# Altium PCB 矩形板V3.0.pcbdoc (part 2 of 2)
Units mm, origin at the board's own origin, x right, y up, seen from the top; angles counter-clockwise.
Board outline 153.8 x 190.94 mm, 2 copper layers (Top Layer, Bottom Layer); 146 components, 210 nets, 672 pads, 247 vias.
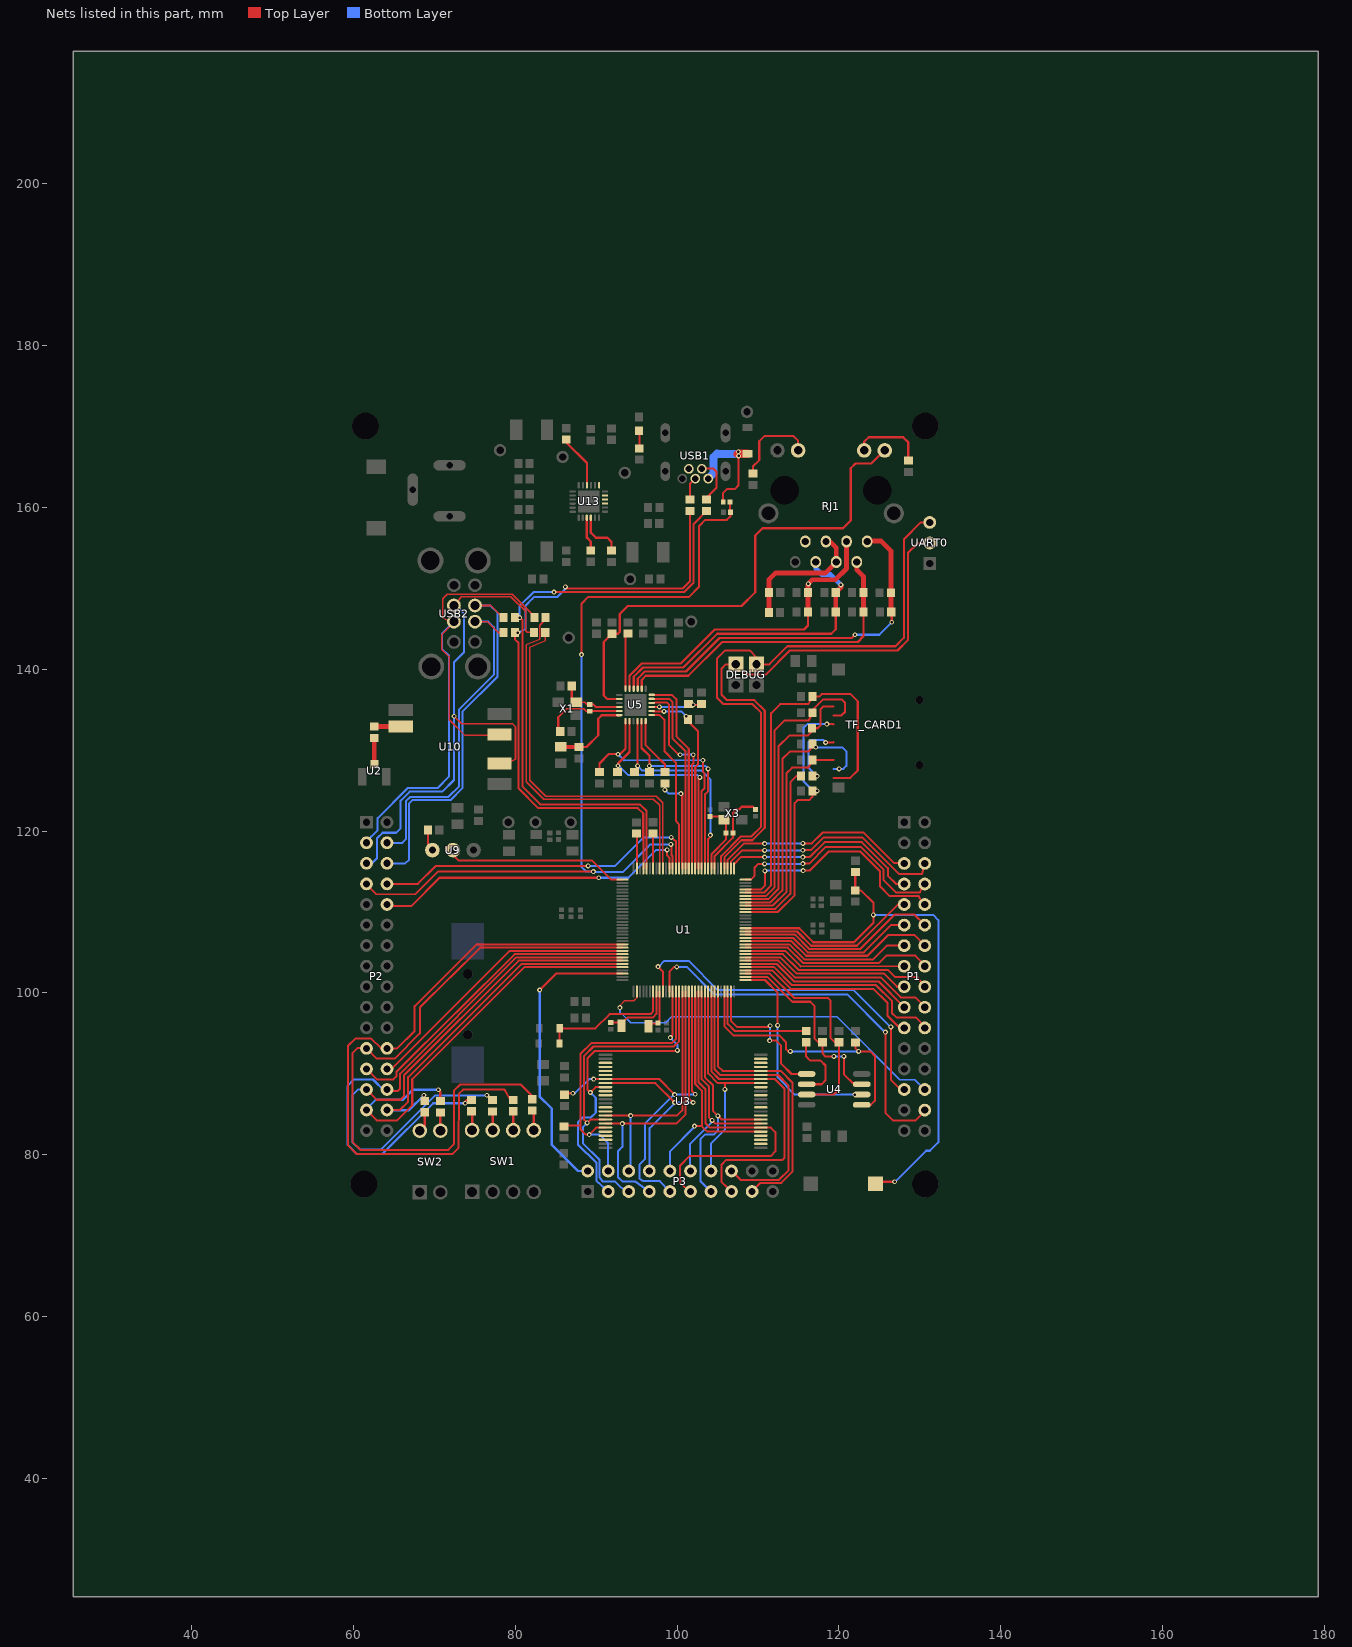
[diagram p2: the nets of this part, all layers, seen from the top]

## Via types
v1: diameter 0.61, hole 0.305, Top Layer to Bottom Layer, 247 vias

## Nets (pads, with @x,y where several pads share a name; then routed paths per layer and width w, separated by ;. In a path a pad name is that pad's centre, name@x,y a point inside that pad or via, vN(x,y) a via of type N, cw(c..) or ccw(c..) an arc to the next point about the centre after c; other vN are vias at no path point) (continued)
PB6: P3.2 U1.30 | length 36.6
  Top Layer w0.254: v1(83.011,100.359) 85.042,102.39 U1.30@93.241,102.389
  Bottom Layer w0.3: v1(83.011,100.359) 83.011,87.221 84.522,85.71 84.526,81.205 87.766,77.999 P3.2@88.951,77.999
PB7: P1.28 U1.34 | length 46.4
  Top Layer w0.2: v1(92.941,98.189) 92.942,98.448 93.511,99.019 94.631,99.019 95.042,99.431 U1.34@95.042,100.188
  Bottom Layer w0.2: v1(92.941,98.189) 92.942,97.648 94.26,96.33 98.601,96.33 99.32,97.048 119.751,97.048 127.519,89.279 129.37,89.279 130.6,88.059 P1.28@130.711,88.059
PB8: P1.27 U1.42 | length 44.5
  Top Layer w0.25: v1(97.641,103.249) 98.24,102.65 U1.42@98.24,100.189 ; v1(126.411,95.809) 126.411,89.279 127.631,88.059 P1.27@128.171,88.059
  Bottom Layer w0.25: v1@97.641,103.241 97.722,103.241 98.42,103.952 101.42,103.952 104.981,100.388 121.771,100.388 126.348,95.811 v1(126.411,95.809)
PB13: P1.10 U1.93 | length 29.3
  Top Layer w0.254: U1.93@108.44,112.79 110.382,112.79 110.841,113.249 v1(110.841,115.089) ; v1(115.561,115.109) 116.36,115.108 118.723,117.47 122.652,117.47 125.065,115.042 125.07,113.162 126.228,111.999 129.833,111.999 130.414,110.919 P1.10@130.711,110.919
  Bottom Layer w0.254: v1(110.841,115.089) 110.861,115.109 v1(115.561,115.109)
PC0: P1.30 U1.44 | length 48.6
  Top Layer w0.25: U1.44@99.04,100.188 99.04,102.629 99.602,103.188 v1@99.96,103.208 ; v1(125.731,95.159) 125.731,85.179 126.701,84.209 129.414,84.209 P1.30@130.711,85.519
  Bottom Layer w0.25: v1@99.96,103.208 101.181,103.208 104.621,99.789 121.061,99.789 125.691,95.159 v1(125.731,95.159)
  other v1: 99.961,103.209
PC1: P3.3 U1.45 U3.9 | length 41.5
  Top Layer w0.25: U3.9@91.151,88.359 89.932,88.359 v1(89.287,87.696) 88.941,88.001 88.935,91.909 89.852,92.838 99.98,92.838 v1(100.041,92.899) ; v1(99.161,94.479) 99.443,94.762 U1.45@99.443,100.196
  Bottom Layer w0.25: v1(89.287,87.696) 89.95,87.028 89.95,85.217 89.342,84.61 88.311,84.61 87.74,84.038 87.732,81.275 90.021,79.042 90.021,76.784 P3.3@91.491,75.459 ; v1(99.161,94.479) 100.041,93.599 v1(100.041,92.899)
PC2: P3.4 R29.2 U1.46 U3.19 | length 39.8
  Top Layer w0.25: R29.2@85.896,83.589 88.032,83.589 ; U3.19@91.151,83.359 90.009,83.359 v1(89.149,82.499) 88.73,82.499 88.07,83.16 88.07,92.469 89.442,93.838 99.391,93.838 99.843,94.29 U1.46@99.843,100.195
  Bottom Layer w0.25: v1(89.149,82.499) 90.43,82.499 91.491,81.44 P3.4@91.491,77.999
PC3: P3.5 U1.47 U3.17 | length 41.6
  Top Layer w0.25: v1(88.896,83.934) 88.527,84.303 88.514,92.222 89.67,93.378 99.602,93.378 100.244,94.018 U1.47@100.244,100.195 ; v1(88.896,83.934) 89.321,84.359 U3.17@91.151,84.359
  Bottom Layer w0.25: v1(88.896,83.934) 88.36,83.416 88.36,81.43 90.412,79.378 90.412,77.214 90.795,76.726 92.291,76.728 92.373,76.657 93.061,75.969 93.914,75.458 P3.5@94.031,75.459
PC4: P3.6 U1.48 U3.16 | length 31.4
  Top Layer w0.25: U3.16@91.151,84.859 94.221,84.859 v1(94.251,84.829) ; v1@94.25,84.828 99.98,84.828 100.643,85.491 U1.48@100.643,100.195
  Bottom Layer w0.25: P3.6@94.031,77.999 94.251,78.219 v1(94.251,84.829)
PC5: P3.7 U1.49 U3.18 | length 36.9
  Top Layer w0.25: U3.18@91.151,83.859 93.221,83.859 v1(93.241,83.839) ; v1(93.241,83.839) 99.894,83.838 101.06,85.034 U1.49@101.044,100.193
  Bottom Layer w0.25: v1(93.241,83.839) 93.241,80.98 92.7,80.439 92.7,77.239 93.244,76.706 94.809,76.711 P3.7@96.571,75.459
PC6: P3.8 U1.50 U3.8 | length 35.5
  Top Layer w0.25: U3.8@91.151,88.859 97.3,88.859 v1(99.7,86.46) ; U1.50@101.442,100.196 101.442,87.003 v1(101.986,86.46)
  Bottom Layer w0.25: P3.8@96.571,77.999 96.611,78.039 96.611,83.299 99.7,86.388 v1(99.7,86.46) v1(101.986,86.46)
PC7: P3.9 R28.1 U1.51 U3.7 | length 47.3
  Top Layer w0.25: R28.1@86.111,87.414 86.3,87.603 v1(87.127,87.603) ; U3.7@91.151,89.359 97.772,89.359 v1(99.7,87.432) ; U1.51@101.844,100.196 101.844,87.872 v1(102.24,87.476)
  Top Layer w0.3: v1(89.691,89.349) 89.701,89.359 U3.7@91.151,89.359
  Bottom Layer w0.25: v1(87.127,87.603) 87.381,87.603 89.127,89.349 v1(89.691,89.349) ; P3.9@99.111,75.459 97.857,76.749 95.792,76.749 95.332,77.069 95.332,78.788 96.04,79.5 96.04,83.878 99.594,87.432 v1(99.7,87.432) 102.196,87.432 v1(102.24,87.476)
PC8: P3.10 U1.52 U3.29 | length 32.3
  Top Layer w0.25: v1(102.151,83.549) 103.051,83.549 ; U1.52@102.243,100.195 102.243,88.743 103.051,87.935 103.051,83.548 ; U3.29@110.351,82.859 103.749,82.86 103.051,83.548
  Bottom Layer w0.25: P3.10@99.111,77.999 99.111,80.399 102.151,83.438 v1(102.151,83.549)
PC9: P3.11 U1.53 U3.30 | length 44.5
  Top Layer w0.25: P3.11@101.651,75.459 100.361,76.49 100.361,78.649 101.588,79.878 111.608,79.878 112.152,80.419 112.152,82.799 111.59,83.358 U3.30@110.351,83.359 104.059,83.358 103.511,83.881 103.511,88.11 102.644,88.966 U1.53@102.644,100.195
PC10: P3.12 U1.54 U3.31 | length 30.1
  Top Layer w0.25: U1.54@103.043,100.195 103.043,89.339 103.97,88.41 103.97,84.599 v1(104.331,84.239) 104.711,83.859 U3.31@110.351,83.859
  Bottom Layer w0.25: P3.12@101.651,77.999 101.611,78.039 101.611,81.338 104.331,84.059 v1(104.331,84.239)
PC11: P3.13 U1.55 U3.32 | length 32.9
  Top Layer w0.25: U1.55@103.445,100.195 103.439,89.576 104.461,88.557 104.461,85.389 v1(105.041,84.809) ; v1@105.04,84.808 105.548,84.359 U3.32@110.351,84.359
  Bottom Layer w0.25: P3.13@104.191,75.459 102.921,76.698 102.921,81.979 103.47,82.53 104.57,82.53 105.041,83.001 v1(105.041,84.809)
PC12: P3.14 U1.56 U3.41 | length 28.7
  Top Layer w0.25: U1.56@103.843,100.196 103.843,90.064 105.047,88.859 U3.41@110.351,88.859 ; v1(105.901,88.079) 105.912,88.09 105.912,88.859
  Bottom Layer w0.25: P3.14@104.191,77.999 104.212,81.42 105.901,83.109 v1(105.901,88.079)
PC13: P3.15 U1.57 U3.42 | length 40.3
  Top Layer w0.25: U1.57@104.244,100.196 104.244,90.297 105.182,89.359 U3.42@110.351,89.359 ; P3.15@106.731,75.459 105.492,76.609 105.492,78.788 106.028,79.329 112.97,79.329 113.269,79.639 113.272,88.156 112.07,89.36 U3.42@110.351,89.359
PC14: P3.16 U1.58 U3.43 | length 38.1
  Top Layer w0.25: U1.58@104.643,100.196 104.643,90.534 105.318,89.859 U3.43@110.351,89.859 ; P3.16@106.731,77.999 107.831,76.909 112.591,76.909 113.79,78.108 113.79,88.539 112.472,89.858 U3.43@110.351,89.859
PC15: P3.17 U1.59 U3.44 | length 36.3
  Top Layer w0.25: U1.59@105.045,100.195 105.045,90.937 105.623,90.359 U3.44@110.351,90.359 ; P3.17@109.231,75.458 110.308,76.538 112.871,76.538 114.25,77.917 114.25,88.931 112.82,90.358 U3.44@110.351,90.359
PD8: P1.21 U1.68 | length 23.5
  Top Layer w0.254: U1.68@108.44,102.788 111.743,102.789 114.021,100.508 124.25,100.508 125.972,98.814 125.969,97.211 127.511,95.669 P1.21@128.047,95.669
PD9: P1.22 U1.69 | length 26.3
  Top Layer w0.254: U1.69@108.44,103.189 111.982,103.19 114.201,100.968 124.572,100.968 126.531,99.009 126.531,97.518 127.082,96.97 129.49,96.97 P1.22@130.711,95.679
PD10: P1.19 U1.70 | length 21.9
  Top Layer w0.254: U1.70@108.44,103.588 112.281,103.589 114.44,101.43 124.88,101.43 P1.19@128.061,98.219
PD11: P1.20 U1.71 | length 24.6
  Top Layer w0.254: U1.71@108.44,103.989 112.52,103.99 114.621,101.89 125.2,101.89 127.62,99.461 129.401,99.459 P1.20@130.711,98.219
PD12: P1.17 U1.72 | length 21.2
  Top Layer w0.254: U1.72@108.44,104.388 112.799,104.369 114.781,102.39 125.588,102.39 127.204,100.759 P1.17@128.171,100.759
PD13: P1.18 U1.73 | length 23.9
  Top Layer w0.254: U1.73@108.44,104.789 113.061,104.79 115.002,102.85 126.051,102.85 126.912,101.989 129.632,101.989 P1.18@130.6,100.759
PD14: P1.15 U1.74 | length 20.4
  Top Layer w0.254: U1.74@108.44,105.188 113.361,105.189 115.261,103.289 P1.15@128.061,103.299
PD15: P1.16 U1.75 | length 24
  Top Layer w0.254: U1.75@108.44,105.589 113.681,105.588 115.56,103.708 124.971,103.708 125.863,104.6 129.424,104.6 P1.16@130.711,103.299
PE10: P2.8 U1.115 | length 41.6
  Top Layer w0.254: P2.8@64.161,113.469 67.981,113.469 70.191,115.679 v1@89.002,115.679 ; v1(99.281,119.209) v1(99.281,119.209) 99.841,118.749 U1.115@99.84,115.388
  Bottom Layer w0.254: v1(89.001,115.689) 92.347,115.689 95.827,119.19 v1@99.282,119.19
PE11: P2.7 R68.1 R69.2 U1.116 | length 107.1
  Top Layer w0.24: P2.7@61.621,113.469 61.771,113.259 62.84,112.189 67.651,112.189 70.44,114.978 v1@89.66,114.978
  Top Layer w0.25: v1(88.191,141.789) 88.192,148.1 89.03,148.938 101.491,148.938 102.711,150.16 102.711,157.678 103.49,158.458 106.137,158.458 106.599,158.915 R69.2@106.584,159.398 ; R68.1@106.545,160.649 106.545,159.439 R69.2@106.585,159.399
  Top Layer w0.254: v1(99.241,118.349) 99.302,118.349 99.302,117.038 99.442,116.886 U1.116@99.441,115.388
  Bottom Layer w0.24: v1(89.661,114.989) 89.721,114.929 93.281,114.929 96.441,118.089 96.681,118.349 v1(99.241,118.349)
  Bottom Layer w0.25: v1(88.191,141.789) 88.182,141.78 88.182,115.578 88.758,115.001 v1@89.66,115.001
PE12: P2.10 U1.117 | length 40.2
  Top Layer w0.254: P2.10@63.831,110.719 67.14,110.719 70.651,114.229 v1(90.321,114.229) ; v1(98.761,117.669) 98.761,116.99 99.04,116.711 U1.117@99.04,115.388
  Bottom Layer w0.254: v1(90.321,114.229) 93.965,114.229 97.425,117.668 v1(98.761,117.669)
PF7: P1.8 U1.96 | length 28.2
  Top Layer w0.254: U1.96@108.44,113.989 109.101,113.99 109.581,114.468 109.581,115.489 110.041,115.949 v1(110.821,115.949) ; v1@115.54,115.969 116.32,115.969 118.39,118.039 122.71,118.039 125.522,115.227 125.52,113.929 127.072,112.38 129.98,112.38 130.473,113.459 P1.8@130.6,113.459
  Bottom Layer w0.254: v1(110.821,115.949) 115.521,115.949 v1@115.541,115.969
  other v1: 115.541,115.969
PF8: P1.7 U1.97 | length 25.4
  Top Layer w0.254: U1.97@107.041,115.388 107.041,115.928 107.879,116.769 v1(110.821,116.769) ; v1@115.54,116.789 116.381,116.789 118.23,118.638 122.83,118.638 126.051,115.407 126.051,114.488 127.087,113.452 P1.7@128.07,113.459
  Bottom Layer w0.254: v1(110.821,116.769) 110.841,116.789 v1@115.541,116.789
  other v1: 115.541,116.789
PF9: P1.6 U1.98 | length 28.9
  Top Layer w0.254: U1.98@106.64,115.388 106.64,116.208 108.042,117.61 v1(110.821,117.609) ; v1@115.54,117.63 116.52,117.63 118.111,119.22 122.876,119.22 127.392,114.709 130.264,114.709 P1.6@130.653,116.037
  Bottom Layer w0.254: v1(110.821,117.609) 115.521,117.609 v1@115.541,117.629
  other v1: 115.541,117.629
PF10: P1.5 U1.99 | length 25.8
  Top Layer w0.254: U1.99@106.241,115.388 106.241,116.429 108.26,118.448 v1(110.821,118.449) ; v1@115.54,118.468 116.64,118.468 117.971,119.799 123.041,119.799 126.81,116.03 P1.5@128.06,116.03
  Bottom Layer w0.254: v1(110.821,118.449) 115.521,118.449 v1@115.541,118.469
  other v1: 115.541,118.469
PG0: P2.29 R18.1 U1.28 | length 53.7
  Top Layer w0.254: P2.29@61.621,85.529 62.891,84.259 65.411,84.259 67.28,86.129 67.28,89.35 81.136,103.19 U1.28@93.241,103.189
  Top Layer w0.3: v1(70.501,88.039) 70.751,87.789 R18.1@70.751,86.649
  Bottom Layer w0.3: P2.29@61.291,85.319 62.772,86.799 66.132,86.799 67.384,88.052 v1(70.501,88.039)
PG1: P2.30 R19.1 U1.27 | length 44.4
  Top Layer w0.254: P2.30@64.161,85.529 65.731,85.529 66.762,86.558 66.762,89.591 80.813,103.589 U1.27@93.241,103.588
  Top Layer w0.3: v1(68.711,87.359) 68.711,86.769 R19.1@68.821,86.659
  Bottom Layer w0.3: P2.30@64.161,85.529 66.881,85.529 v1(68.711,87.359)
PG3: P2.27 R61.1 U1.26 | length 69.4
  Top Layer w0.254: P2.27@61.621,88.069 62.891,86.799 65.83,86.799 66.262,87.226 66.259,89.817 80.414,103.99 U1.26@93.241,103.989 ; v1(76.501,87.359) 77.101,86.759 R61.1@77.201,86.759
  Bottom Layer w0.25: P2.27@61.621,88.08 60.6,88.08 59.871,87.348 59.871,81.572 60.839,80.63 63.391,80.63 70.099,87.338 v1@76.5,87.338
PG5: P2.28 R60.1 U1.25 | length 68.8
  Top Layer w0.254: P2.28@63.831,87.859 65.461,87.859 65.792,88.189 65.792,90.028 80.125,104.389 U1.25@93.241,104.388 ; v1(73.811,86.369) 73.811,86.589 74.001,86.779 R60.1@74.591,86.779
  Bottom Layer w0.25: P2.28@63.831,87.859 63.871,87.859 62.431,89.299 60.069,89.299 59.302,88.527 59.302,81.222 60.435,80.099 63.592,80.099 69.861,86.368 v1@73.81,86.368
PG6: P2.25 U1.24 | length 38.9
  Top Layer w0.254: P2.25@61.621,90.609 62.911,89.319 64.953,89.319 65.332,89.703 65.332,90.272 79.919,104.79 U1.24@93.241,104.789
PG7: P2.26 U1.23 | length 35.1
  Top Layer w0.254: P2.26@64.161,90.609 64.74,90.609 79.322,105.189 U1.23@93.241,105.188
PG8: P2.23 R62.1 U1.22 | length 83.5
  Top Layer w0.254: P2.23@61.621,93.149 62.881,91.89 65.101,91.89 68.22,95.006 68.22,98.191 75.657,105.59 U1.22@93.241,105.589 ; P2.23@61.621,93.17 60.491,93.17 59.871,92.547 59.871,81.598 60.882,80.612 71.74,80.62 72.421,81.308 72.426,87.894 73.241,88.71 80.651,88.71 82.101,87.259 R62.1@82.101,86.859
PG9: P2.24 R63.1 U1.21 | length 83.2
  Top Layer w0.25: P2.24@64.161,93.139 63.429,93.139 62.21,94.359 60.254,94.359 59.33,93.439 59.33,81.199 60.453,80.079 72.231,80.079 73.018,80.891 73.028,87.526 73.561,88.059 78.672,88.059 79.391,86.779 R63.1@79.761,86.779
  Top Layer w0.254: P2.24@64.161,93.149 65.418,93.149 67.575,95.293 67.567,98.359 75.23,105.989 U1.21@93.5,105.989
PG11: P1.13 U1.76 | length 21.1
  Top Layer w0.254: U1.76@108.44,105.988 113.881,105.989 115.72,104.148 124.225,104.148 125.946,105.869 P1.13@128.061,105.869
PG12: P1.14 U1.77 | length 24.5
  Top Layer w0.254: U1.77@108.44,106.389 114.141,106.39 115.941,104.59 123.521,104.59 126.061,107.13 129.34,107.13 P1.14@130.6,105.87
PG13: P1.11 U1.78 | length 21.8
  Top Layer w0.254: U1.78@108.44,106.788 114.382,106.769 116.139,105.009 123.071,105.009 126.47,108.41 P1.11@128.06,108.41
PG14: P1.12 U1.79 | length 25.2
  Top Layer w0.254: U1.79@108.44,107.189 114.58,107.188 116.34,105.428 122.611,105.428 126.894,109.69 129.32,109.69 P1.12@130.6,108.41
PG15: P1.9 U1.80 | length 22.5
  Top Layer w0.254: U1.80@108.44,107.588 114.821,107.589 116.559,105.829 122.21,105.829 127.331,110.95 P1.9@128.06,110.95
R3_1: R3.1 U2.3 | length 3.3
  Top Layer w0.6: R3.1@62.581,131.509 62.581,128.249 U2.3@62.591,128.239
R3_2: R3.2 U10.6 | length 3.3
  Top Layer w0.6: R3.2@62.581,132.909 65.853,132.909 U10.6@65.869,132.925
R9_2: LED4.1 R9.2 | length 2.3
  Top Layer w0.28: LED4.1@95.321,169.458 95.342,169.437 R9.2@95.342,167.168
R11_2: R11.2 U13.10 | length 6
  Top Layer w0.3: U13.10@89.345,158.719 89.345,156.853 89.947,156.251 91.367,156.251 91.897,155.723 R11.2@91.897,154.651
R60_2: R60.2 SW1.8 | length 2.4
  Top Layer w0.3: R60.2@74.591,85.379 74.671,85.299 SW1.8@74.671,83.029
R61_2: R61.2 SW1.7 | length 2.3
  Top Layer w0.3: R61.2@77.201,85.359 77.201,83.039 SW1.7@77.211,83.029
R62_2: R62.2 SW1.5 | length 2.5
  Top Layer w0.3: R62.2@82.101,85.459 82.291,85.269 SW1.5@82.291,83.029
R63_2: R63.2 SW1.6 | length 2.4
  Top Layer w0.3: SW1.6@79.751,83.029 79.751,85.369 R63.2@79.761,85.379
R73_2: R73.2 U13.9 | length 4.3
  Top Layer w0.3: U13.9@88.847,158.719 88.847,156.251 89.337,155.761 R73.2@89.337,154.671
R74_1: R74.1 U13.22 | length 6.7
  Top Layer w0.28: R74.1@86.307,168.361 86.307,168.011 88.862,165.456 U13.22@88.862,162.719
RESET: C50.2 R64.1 SW3.2 U1.81 | length 70.8
  Top Layer w0.254: U1.81@108.44,107.989 115.09,107.991 116.82,106.258 121.862,106.258 124.261,108.657 v1(124.261,109.649) 124.261,111.119 122.703,112.677 R64.1@122.017,112.678 ; SW3.2@124.511,76.399 124.781,76.669 v1(126.871,76.669)
  Top Layer w0.3: R64.1@122.017,112.678 122.017,114.878 C50.2@122.067,114.928
  Bottom Layer w0.25: v1(124.261,109.649) 126.501,109.649 131.641,109.649 132.291,108.999 132.291,81.539 132.261,81.539 131.221,80.499 130.771,80.499 126.941,76.669 v1(126.871,76.669)
RJ1_4: C42.1 R17.1 RJ1.4 RJ1.5 | length 16.6
  Top Layer w0.6: C42.1@111.341,149.456 111.341,151.067 112.136,151.859 118.296,151.859 RJ1.4@119.666,153.234 ; R17.1@111.343,147.043 C42.1@111.343,149.456 ; RJ1.5@118.395,155.814 118.867,155.809 119.662,155.019 RJ1.4@119.665,153.274
RJ1_7: RJ1.7
RJ1_10: R46.2 RJ1.10 | length 9.2
  Top Layer w0.3: RJ1.10@123.116,167.064 123.112,168.09 123.681,168.659 127.92,168.659 128.57,168.008 R46.2@128.571,165.759
RJ1_11: R47.2 RJ1.11 | length 10.8
  Top Layer w0.254: R47.2@109.371,164.159 109.37,165.039 110.15,165.819 110.15,168.168 110.811,168.829 114.321,168.829 114.948,168.199 RJ1.11@114.946,167.024
RMIIOREFCLK: C23.2 U1.109 U5.14 | length 23.4
  Top Layer w0.254: U5.14@97.006,134.808 97.025,134.789 v1(98.381,134.789) ; C23.2@101.115,133.566 101.344,133.566 102.581,132.329 102.581,128.229 102.241,127.889 U1.109@102.24,115.388
  Bottom Layer w0.254: v1(98.381,134.789) 100.501,134.789 v1(101.121,134.169)
RMIOCRSDV: R36.2 U1.106 U5.11 | length 26.7
  Top Layer w0.254: U1.106@103.442,115.388 103.441,124.509 103.841,124.909 v1(103.841,127.689)
  Top Layer w0.28: U5.11@95.616,133.678 95.616,130.254 96.581,129.289 v1(96.581,128.049) R36.2@96.581,127.289
  Bottom Layer w0.254: v1(96.581,128.049) 103.48,128.049 v1(103.841,127.689)
RMIOMDC: U1.114 U5.13 | length 21
  Top Layer w0.254: U5.13@96.767,134.328 97.841,134.328 98.42,133.749 98.42,129.888 99.858,128.45 99.858,121.275 100.221,120.828 U1.114@100.241,115.388
RMIOMDIO: R43.1 U1.113 | length 12.3
  Top Layer w0.254: v1(98.501,125.089) R43.1@98.501,125.889 ; v1@100.461,124.629 100.64,124.449 U1.113@100.64,115.388
  Bottom Layer w0.254: v1(98.501,125.089) 98.501,125.069 98.921,124.649 100.441,124.649 v1@100.461,124.629
  other v1: 100.461,124.629
RMIORXD0: R34.2 U1.108 U5.8 | length 29
  Top Layer w0.254: U1.108@102.642,115.388 102.642,126.413 v1@102.82,126.629
  Top Layer w0.28: R34.2@92.66,127.29 92.7,127.328 v1(92.7,128.069) 92.7,128.356 94.113,129.766 U5.8@94.118,133.678
  Bottom Layer w0.254: v1(92.7,128.069) 92.802,128.069 93.96,126.909 102.54,126.909 v1@102.82,126.629
  other v1: 102.821,126.629
RMIORXD1: R35.2 U1.107 U5.7 | length 32.9
  Top Layer w0.254: U1.107@103.04,115.388 103.041,124.948 103.401,125.311 103.401,127.094 103.18,127.345 v1(103.181,128.749)
  Top Layer w0.28: R35.2@90.401,127.269 90.401,128.089 90.401,128.341 91.572,129.513 92.969,129.513 93.604,130.148 93.617,130.16 U5.7@93.617,133.678
  Bottom Layer w0.254: v1(92.701,129.489) 93.46,128.73 v1(103.181,128.749)
RMIORXER: R37.2 U1.105 U5.10 | length 27.4
  Top Layer w0.254: U1.105@103.84,115.388 103.841,119.009 104.12,119.289 v1(104.121,119.489)
  Top Layer w0.28: R37.2@94.721,127.269 95.117,127.665 v1(95.117,128.049) U5.10@95.117,133.678
  Bottom Layer w0.254: v1@95.116,128.049 95.7,127.47 103.041,127.47 104.12,126.39 v1(104.121,119.489)
RMIOTXD0: U1.112 U5.17 | length 23.9
  Top Layer w0.254: U5.17@96.861,136.33 99.039,136.33 99.421,135.948 99.421,131.488 101.042,129.868 U1.112@101.041,115.388
RMIOTXD1: U1.111 U5.18 | length 24.8
  Top Layer w0.254: U5.18@96.861,136.831 99.359,136.831 99.901,136.289 99.901,131.689 101.441,130.15 U1.111@101.44,115.388
RMIOTXEN: U1.110 U5.16 | length 24.9
  Top Layer w0.254: U5.16@96.767,135.827 97.261,135.869 98.761,135.869 98.982,135.649 98.982,130.668 100.221,129.428 v1(100.381,129.429) ; U1.110@101.841,115.388 101.842,128.196 102.001,128.355 v1(102.001,129.429)
  Bottom Layer w0.254: v1(100.381,129.429) v1(102.001,129.429)
RTCVD: D4.2 D5.2 U1.39 | length 16.8
  Top Layer w0.25: D5.2@85.471,93.749 85.471,95.569 D4.2@85.531,95.629 ; D4.2@85.53,95.629 89.901,95.629 91.662,97.389 96.719,97.389 97.044,97.711 U1.39@97.044,100.195
RXD0: DEBUG.c U1.100 UART0.2 | length 71.2
  Top Layer w0.254: U1.100@105.842,115.387 105.842,116.751 107.951,118.859 109.292,118.859 110.831,120.399 110.831,134.889 109.551,136.169 106.17,136.169 105.492,136.848 105.492,140.068 106.02,140.599 DEBUG.c@107.261,140.599 107.29,140.599 108.56,139.329 110.966,139.329 113.92,142.309 127.232,142.309 128.509,143.586 128.517,154.346 129.762,155.588 UART0.2@131.209,155.588
RXN: C38.1 R40.1 RJ1.6 U5.22 | length 39.4
  Top Layer w0.28: U5.22@94.632,137.589 94.633,139.05 95.781,140.198 100.77,140.198 104.961,144.389 119.05,144.389 119.602,144.94 R40.1@119.601,147.043
  Top Layer w0.6: R40.1@119.601,147.043 C38.1@119.601,149.456 120.231,150.086 v1(120.231,150.409)
  Bottom Layer w0.6: RJ1.6@117.126,153.274 117.126,152.441 117.872,151.695 118.945,151.695 v1(120.231,150.409)
RXP: C37.1 R38.1 RJ1.3 U5.23 | length 40.3
  Top Layer w0.28: U5.23@94.13,137.589 94.13,139.2 95.632,140.698 100.45,140.698 104.651,144.899 115.68,144.899 116.173,145.39 R38.1@116.172,147.043
  Top Layer w0.6: R38.1@116.172,147.043 C37.1@116.172,149.456 116.172,150.495 v1(116.222,150.545) ; v1@116.221,150.546 116.716,151.039 119.561,151.039 120.935,152.413 RJ1.3@120.935,155.814
S$19: 
S$28: 
S$30: 
S$42: 
S$44: 
S$47: 
S$48: 
S$49: 
S$50: 
S$53: 
S$54: 
S$55: 
S$57: 
S$61: 
S$67: 
S$69: 
S$71: 
S$73: 
S$77: 
S$79: 
S$81: 
S$2331: 
SD_CD: R24.1 TF_CARD1.9 U1.92 | length 48.9
  Top Layer w0.25: U1.92@108.443,112.395 110.734,112.395 111.621,113.282 111.621,134.551 112.744,135.669 116.203,135.669 R24.1@116.721,136.599 117.542,136.599 117.851,136.909 121.43,136.909 122.322,136.02 122.322,127.478 121.42,126.578 119.32,126.578
SD_CLK: R15.1 U1.87 | length 21.8
  Top Layer w0.25: U1.87@108.443,110.396 112.136,110.396 113.991,112.25 113.991,126.036 114.773,126.819 R15.1@115.321,126.819
SD_CLK-P: R15.2 TF_CARD1.5 | length 8
  Top Layer w0.25: v1(118.361,130.939) 119.281,130.939 119.321,130.979
  Bottom Layer w0.25: v1(117.291,126.779) 117.249,126.779 116.241,127.79 116.241,130.988 116.51,131.26 118.042,131.26 v1@118.359,130.94
SD_CMD: R72.1 TF_CARD1.3 U1.86 | length 34.2
  Top Layer w0.25: U1.86@108.443,109.995 112.436,109.995 114.514,112.072 114.522,123.439 114.91,123.83 116.32,123.828 116.721,124.229 R72.1@116.721,124.959 ; v1(118.501,133.209) 119.291,133.209 119.321,133.179
  Bottom Layer w0.25: v1(117.301,124.949) 116.831,124.949 115.621,126.159 115.621,132.739 116.091,133.209 v1(118.501,133.209)
SD_D0: R71.1 TF_CARD1.7 U1.88 | length 27.2
  Top Layer w0.25: U1.88@108.443,110.795 111.834,110.795 113.5,112.461 113.5,127.107 114.212,127.82 116.185,127.818 116.82,128.778 R71.1@116.721,128.779 ; R71.1@116.721,128.779 119.321,128.779
SD_D1: R70.1 TF_CARD1.8 U1.89 | length 34.3
  Top Layer w0.25: U1.89@108.443,111.196 111.537,111.196 113.01,112.672 113.01,128.9 113.96,129.845 116.241,129.84 116.721,130.33 R70.1@116.721,130.759 v1(117.131,130.349)
  Bottom Layer w0.25: v1(117.131,130.349) 120.422,130.348 120.917,129.852 120.925,128.064 120.549,127.688 v1(120.021,127.689) 119.32,127.689 119.32,127.678
SD_D2: R26.1 TF_CARD1.1 U1.90 | length 32.9
  Top Layer w0.25: U1.90@108.443,111.595 111.247,111.595 112.53,112.878 112.53,130.457 113.871,131.798 116.15,131.798 117.051,132.7 R26.1@116.681,132.699 117.351,132.7 117.73,133.078 117.73,135.07 118.032,135.369 119.32,135.369
SD_D3: R25.1 TF_CARD1.2 U1.91 | length 37.6
  Top Layer w0.25: U1.91@108.443,111.996 111.014,111.996 112.05,113.035 112.05,132.428 113.262,133.64 116.236,133.64 116.797,134.618 116.721,134.618 116.399,134.618 118.039,136.258 120.318,136.258 120.742,135.844 120.742,134.709 120.31,134.28 119.32,134.28
SPEED_LED: R48.2 RJ1.9 U5.2 | length 62.4
  Top Layer w0.28: R48.2@91.965,144.38 90.937,143.351 90.937,142.975 90.937,136.752 91.368,136.32 U5.2@92.861,136.32 ; R48.2@91.965,144.38 92.703,144.381 92.901,144.579 92.901,146.81 93.899,147.808 107.971,147.808 109.67,149.507 109.67,156.512 110.562,157.419 120.501,157.419 121.461,158.379 121.461,164.808 122.05,165.4 123.978,165.4 RJ1.9@125.657,167.063
SPI_CLK: R16.2 U1.62 | length 14
  Top Layer w0.254: U1.62@106.241,100.189 106.241,96.189 107.161,95.269 R16.2@115.901,95.269
SPI_CS: R30.1 U1.61 U4.1 | length 33.6
  Top Layer w0.254: U1.61@105.842,100.189 105.842,95.867 106.96,94.75 112.601,94.75 113.46,93.889 113.46,93.048 113.732,92.779 v1(114.001,92.779) ; R30.1@122.02,93.889 122.02,93.17 v1(122.421,92.769) 123.876,92.768 124.43,92.21 124.43,86.67 123.935,86.175 U4.1@122.81,86.175
  Bottom Layer w0.254: v1(114.001,92.779) 114.011,92.769 v1(122.421,92.769)
SPI_D3: R31.1 U1.67 U4.7 | length 27.9
  Top Layer w0.254: U1.67@108.44,102.389 111.44,102.39 114.44,99.388 118.621,99.388 118.961,99.05 118.961,94.409 119.462,93.909 R31.1@120.001,93.909 ; U4.7@116.011,87.444 119.336,87.444 120.001,88.109 R31.1@120.001,93.909
SPI_DI: U1.65 U4.2 | length 26.4
  Top Layer w0.254: U1.65@108.44,101.589 110.861,101.59 112.421,100.031 v1(112.421,95.979) ; v1(121.971,87.429) 122.796,87.429 U4.2@122.811,87.444
  Bottom Layer w0.254: v1(112.421,95.979) 112.421,89.568 114.56,87.429 v1(121.971,87.429)
SPI_DO: U1.63 U4.5 | length 18.4
  Top Layer w0.254: U1.63@106.64,100.189 106.64,96.55 107.391,95.799 111.491,95.799 v1(111.491,95.939) ; v1(111.441,94.099) 112.251,94.099 112.861,93.489 112.861,91.259 114.136,89.984 U4.5@116.011,89.984
  Bottom Layer w0.254: v1(111.441,94.099) 111.491,94.149 v1(111.491,95.939)
SPI_WP: R32.1 U1.66 U4.3 | length 24.3
  Top Layer w0.254: U1.66@108.44,101.99 111.159,101.991 114.24,98.908 116.46,98.908 116.96,98.41 116.96,94.409 117.46,93.909 R32.1@117.961,93.909 117.981,92.589 118.281,92.149 v1(119.381,92.149) ; v1(120.601,92.149) 120.601,89.969 121.856,88.714 U4.3@122.811,88.714
  Bottom Layer w0.254: v1(119.381,92.149) v1(120.601,92.149)
SW2_3: R18.2 SW2.3 | length 2.3
  Top Layer w0.3: R18.2@70.751,85.249 70.751,82.989 SW2.3@70.761,82.979
SW2_4: R19.2 SW2.4 | length 2.5
  Top Layer w0.3: SW2.4@68.221,82.979 68.821,83.579 R19.2@68.821,85.259
TXD0: DEBUG.a U1.101 UART0.3 | length 75.4
  Top Layer w0.254: U1.101@105.441,115.387 105.441,116.909 107.851,119.319 109.162,119.319 110.391,120.548 110.391,134.597 109.292,135.7 105.68,135.7 104.941,136.439 104.941,141.338 105.931,142.329 108.961,142.329 109.802,141.458 DEBUG.a@109.801,140.599 111.4,140.599 113.63,142.829 126.983,142.829 128.019,143.866 128.029,156.058 130.102,158.128 UART0.3@131.209,158.128
TXN: C36.1 R42.1 RJ1.2 U5.20 | length 40.3
  Top Layer w0.28: U5.20@95.63,137.589 95.632,138.669 96.14,139.179 101.367,139.179 105.565,143.368 122.35,143.368 123.031,144.087 R42.1@123.03,147.043
  Top Layer w0.6: RJ1.2@122.206,153.274 122.205,152.273 123.023,151.455 C36.1@123.03,149.456 R42.1@123.03,147.043
TXP: C35.1 R41.1 RJ1.1 U5.21 | length 47.8
  Top Layer w0.28: U5.21@95.129,137.589 95.129,138.829 96.01,139.708 101.1,139.708 105.23,143.858 121.59,143.858 v1(121.981,144.249)
  Top Layer w0.3: R41.1@126.459,147.043 126.522,146.98 v1(126.522,145.795)
  Top Layer w0.6: RJ1.1@123.475,155.814 125.215,155.814 126.421,154.607 C35.1@126.421,149.443 ; C35.1@126.422,149.445 126.422,147.08 R41.1@126.459,147.043
  Bottom Layer w0.28: v1(121.981,144.249) 124.976,144.249 v1(126.522,145.795)
U3_3: U3.3
U3_4: U3.4
U3_5: U3.5
U3_6: U3.6
U3_10: U3.10
U3_11: U3.11
U3_14: U3.14
U3_15: U3.15
U3_20: U3.20
U3_21: U3.21
U3_22: U3.22
U3_26: U3.26
U3_27: U3.27
U3_28: U3.28
U3_33: U3.33
U3_35: U3.35
U3_38: U3.38
U3_40: U3.40
U3_45: U3.45
U3_46: U3.46
U3_47: U3.47
U4_6: R16.1 U4.6 | length 9
  Top Layer w0.254: R16.1@115.901,93.868 115.901,92.2 116.471,91.628 117.741,91.628 118.341,91.029 118.341,89.199 117.856,88.714 U4.6@116.011,88.714
U5_6: C33.1 C34.1 U5.6 | length 10.1
  Top Layer w0.28: C34.1@87.867,130.378 88.816,130.379 90.266,131.827 90.266,133.879 90.709,134.321 U5.6@92.861,134.321
  Top Layer w0.5: C33.1@85.617,130.394 87.851,130.394 C34.1@87.867,130.378
U5_12: R43.2 U5.12 | length 7.4
  Top Layer w0.254: U5.12@96.117,133.678 96.117,130.613 97.441,129.289 98.321,128.409 98.501,128.229 R43.2@98.501,127.289
U5_15: C43.2 R14.1 U5.15 | length 7.3
  Top Layer w0.254: U5.15@96.767,135.327 96.768,135.329 v1(97.801,135.329)
  Top Layer w0.28: R14.1@101.067,135.578 v1(101.981,135.578) 102.879,135.578 C43.2@103.017,135.439
  Bottom Layer w0.254: v1(97.801,135.329) 101.732,135.329 v1(101.981,135.578)
U5_24: R49.2 U5.24 | length 7
  Top Layer w0.28: U5.24@93.617,137.478 93.617,144.074 93.921,144.377 R49.2@93.921,144.389
U9_3: R20.1 U9.3 | length 2.7
  Top Layer w0.254: R20.1@69.211,120.109 69.211,118.209 U9.3@69.771,117.649
U13_15: U13.15
U13_16: U13.16
U13_17: U13.17
U13_19: U13.19
USB0_DM: R12.2 R53.2 U1.124 | length 79.6
  Top Layer w0.25: R53.2@79.951,146.389 80.541,146.389 v1(80.551,146.379) ; v1(84.791,149.53) 100.892,149.53 102.03,150.668 102.03,157.927 103.64,159.588 R12.2@103.641,159.559
  Top Layer w0.254: R53.2@79.95,146.388 79.959,146.379 v1(80.551,146.379) 80.91,146.02 80.91,125.476 83.092,123.299 95.4,123.299 96.218,122.481 U1.124@96.241,115.387
  Bottom Layer w0.25: v1(80.551,146.379) 80.551,147.81 82.271,149.53 v1(84.791,149.53)
USB0_DM_E: P2.6 R53.1 USB2.2 | length 48
  Top Layer w0.2: USB2.2@75.025,147.87 76.97,147.869 78.451,146.388 R53.1@78.551,146.389
  Bottom Layer w0.25: P2.6@64.161,116.009 66.399,116.009 66.902,116.462 66.902,123.419 67.29,123.81 72.002,123.81 73.48,125.288 73.48,134.719 77.791,139.029 77.791,147.018 76.94,147.869 USB2.2@75.025,147.87
USB0_DP: R13.2 R54.2 U1.125 | length 77.8
  Top Layer w0.25: R54.2@79.951,144.529 80.33,144.529 v1(80.341,144.518) ; v1(86.211,150.169) 86.41,149.969 87.029,149.969 100.681,149.969 101.59,150.879 R13.2@101.591,159.559
  Top Layer w0.254: R54.2@79.95,144.529 79.95,143.708 80.43,143.228 80.43,125.258 82.85,122.84 95.162,122.84 95.819,122.179 U1.125@95.84,115.387
  Bottom Layer w0.25: v1(80.341,144.518) 81.27,144.935 81.27,147.848 82.111,148.689 82.37,148.938 85.22,148.938 86.211,149.929 v1(86.211,150.169)
USB0_DP_E: P2.4 R54.1 USB2.3 | length 42.6
  Top Layer w0.2: USB2.3@75.025,145.877 76.561,145.877 77.91,144.529 R54.1@78.551,144.529
  Bottom Layer w0.25: P2.4@64.161,118.549 66.043,118.549 66.5,118.999 66.5,123.688 67.021,124.209 71.73,124.209 73.061,125.54 73.061,135.029 77.351,139.319 77.351,145.179 76.67,145.86 USB2.3@75.025,145.88
USB0_ID: U1.1 U9.2 | length 22.8
  Top Layer w0.26: U9.2@72.311,117.649 72.311,117.06 73.02,116.35 89.5,116.35 91.86,113.99 U1.1@93.241,113.989
USB0_REXT: R51.2 U1.127 | length 4.4
  Top Layer w0.254: R51.2@94.971,119.679 95.06,119.68 U1.127@95.06,115.39
USB1_1: D6.1 R68.2 USB1.1 | length 16.7
  Top Layer w0.25: R68.2@105.697,160.649 105.697,161.784 106.161,162.249 107.141,162.249 107.591,162.699 v1(107.591,166.349)
  Top Layer w1: v1@107.447,166.599 108.676,166.599 D6.1@108.691,166.613 107.625,166.613 v1@107.591,166.579
  Bottom Layer w1: USB1.1@103.851,163.584 103.973,163.69 104.522,164.239 104.522,166.207 104.923,166.609 107.63,166.599 108.751,166.599
  other v1: 107.581,166.859
USB1_2: R12.1 USB1.2 | length 6.2
  Top Layer w0.25: USB1.2@103.051,164.788 104.494,164.788 104.862,164.419 104.862,162.38 103.442,160.96 R12.1@103.641,160.959
USB1_3: R13.1 USB1.3 | length 2.9
  Top Layer w0.25: R13.1@101.591,160.959 101.591,162.923 USB1.3@102.25,163.583
USB1_4: USB1.4
USB1_DM: R58.2 U1.119 | length 45.2
  Top Layer w0.18: R58.2@83.711,144.549 83.704,143.508 81.811,142.702 81.811,126.253 83.77,124.323 97.44,124.323 98.24,123.51 U1.119@98.24,115.388
USB1_DM_E: P2.5 R58.1 U10.2 USB2.6 | length 69.6
  Top Layer w0.18: USB2.6@72.424,147.87 72.502,147.87 73.316,148.969 79.451,148.969 81.291,147.129 81.291,144.749 81.469,144.549 R58.1@82.311,144.549
  Top Layer w0.2: v1(72.441,134.183) 73.391,133.238 79.66,133.238 80.031,132.888 80.031,128.854 78.857,128.339 U10.2@78.06,128.339
  Bottom Layer w0.25: P2.5@61.291,115.799 62.091,115.799 62.901,116.609 62.901,119.078 63.61,119.789 65.291,119.789 65.837,120.335 65.845,123.762 66.95,124.869 70.999,124.869 72.441,126.307 72.441,140.858 73.701,142.118 73.701,146.855 72.728,147.869 USB2.6@72.424,147.87
USB1_DP: R59.2 U1.120 | length 47.1
  Top Layer w0.18: R59.2@83.76,146.388 83.76,146.159 83.01,145.41 83.01,143.721 81.38,143.035 81.38,126.119 83.551,123.95 97.082,123.95 97.841,123.188 U1.120@97.841,115.388
USB1_DP_E: P2.3 R59.1 U10.3 USB2.7 | length 71.3
  Top Layer w0.18: USB2.7@72.424,145.868 71.926,145.867 71.052,146.365 71.052,148.709 71.601,149.258 79.63,149.258 81.872,147.015 R59.1@82.361,146.389
  Top Layer w0.2: USB2.7@72.401,145.769 70.928,144.288 70.928,142.424 71.837,141.512 71.841,133.759 73.798,131.811 U10.3@78.037,131.811
  Bottom Layer w0.25: P2.3@61.621,118.549 61.773,118.549 62.21,119.319 62.99,120.096 62.99,121.59 66.721,125.319 70.407,125.319 71.842,126.746 71.842,141.638 70.94,142.537 70.94,144.389 USB2.7@72.424,145.868
USB1_REXT: R52.2 U1.122 | length 4.3
  Top Layer w0.254: U1.122@97.041,115.388 R52.2@97.041,119.683
X2_IN: C47.2 U1.40 X2.1 | length 10.7
  Top Layer w0.25: C47.2@91.801,96.353 93.414,96.352 92.995,95.933 X2.1@93.153,95.933 92.835,95.933 93.892,96.99 97.031,96.99 97.443,97.401 U1.40@97.443,100.195
X2_OUT: C48.2 U1.41 X2.2 | length 5.5
  Top Layer w0.25: X2.2@96.449,95.885 96.449,96.218 97.42,96.218 97.844,96.642 U1.41@97.844,100.195
X_IN: C49.2 R55.1 U1.103 X3.1 | length 11
  Top Layer w0.254: U1.103@104.643,115.395 104.643,116.911 106.902,119.167 R55.1@106.9,119.767
  Top Layer w0.28: R55.1@106.899,119.766 106.899,122.268 107.341,122.707 107.702,122.707 X3.1@108.001,123.009 ; X3.1@108.001,123.009 109.345,123.009 C49.2@109.681,122.673
X_OUT: C46.2 R55.2 U1.104 X3.3 | length 8.7
  Top Layer w0.254: U1.104@104.244,115.395 104.244,117.105 106.067,118.978 R55.2@106.051,119.767
  Top Layer w0.28: C46.2@104.081,121.785 105.425,121.785 X3.3@105.801,121.409 106.051,121.158 R55.2@106.051,119.767
XTAL1: C41.2 R50.1 U5.5 X1.1 | length 9.8
  Top Layer w0.24: 85.317,134.076 86.348,135.108 88.487,135.108 88.791,134.803 R50.1@89.215,134.803
  Top Layer w0.25: R50.1@89.217,134.803 89.217,134.822 U5.5@92.861,134.822
  Top Layer w0.28: 85.317,134.078 85.317,132.689 C41.2@85.529,132.477
XTAL2: C40.1 R50.2 U5.4 X1.3 | length 7.8
  Top Layer w0.24: X1.3@87.521,135.909 88.585,135.909 88.843,135.652 R50.2@89.217,135.652
  Top Layer w0.25: R50.2@89.217,135.652 89.643,135.652 89.972,135.322 U5.4@92.861,135.322
  Top Layer w0.28: C40.1@86.981,137.909 86.981,136.449 X1.3@87.521,135.909
pads on no net: B1.0 RJ1.15 RJ1.16 TF_CARD1.

## Polygon pours and split planes (outlines as drawn)
GND on Bottom Layer (solid): 38.14,203.378 153.96,203.638 154.22,54.278 38.14,54.798 38.1,203.338
GND on Top Layer (solid): 50.417,187.2 166.237,187.46 166.497,38.1 50.417,38.62 50.377,187.16

## Silkscreen, mask and mechanical layers (free items; w line width, h text height)
Top Overlay:
  text "G  R  T" at 133.965,152.382 h1.2 r90
  text "3V3          RXD / GND          TXD" at 108.427,133.831 h0.8 r90
  text "BOOT1 / BOOT0" at 69.213,88.479 h1.4 r90
  text "PG5(UART0MSG) / PG3(WTD) / PG8 / PG9" at 75.65,87.937 h1.4 r90
Bottom Overlay:
  text "Galaxy NUC980DK61 Dev Board 2.0(201907)" at 60.082,148.669 h1.5 r90

## Text inside footprints (layer, text, board x,y; h text height)
SW1: Top Overlay "ON" at 73.274,81.491 h0.5; Top Overlay "1" at 74.544,76.911 h0.5 r180; Top Overlay "2" at 77.084,76.929 h0.5 r180; Top Overlay "3" at 79.624,76.929 h0.5 r180; Top Overlay "4" at 82.18,76.866 h0.5 r145
SW2: Top Overlay "ON" at 66.824,81.441 h0.5; Top Overlay "1" at 68.094,76.861 h0.5 r180; Top Overlay "2" at 70.634,76.879 h0.5 r180